# Altium PCB INCAM.PcbDoc
Units mm, origin at the board's own origin, x right, y up, seen from the top; angles counter-clockwise.
Board outline 60 x 44 mm, 2 copper layers (Top Layer, Bottom Layer); 20 components, 10 nets, 71 pads, 5 vias.
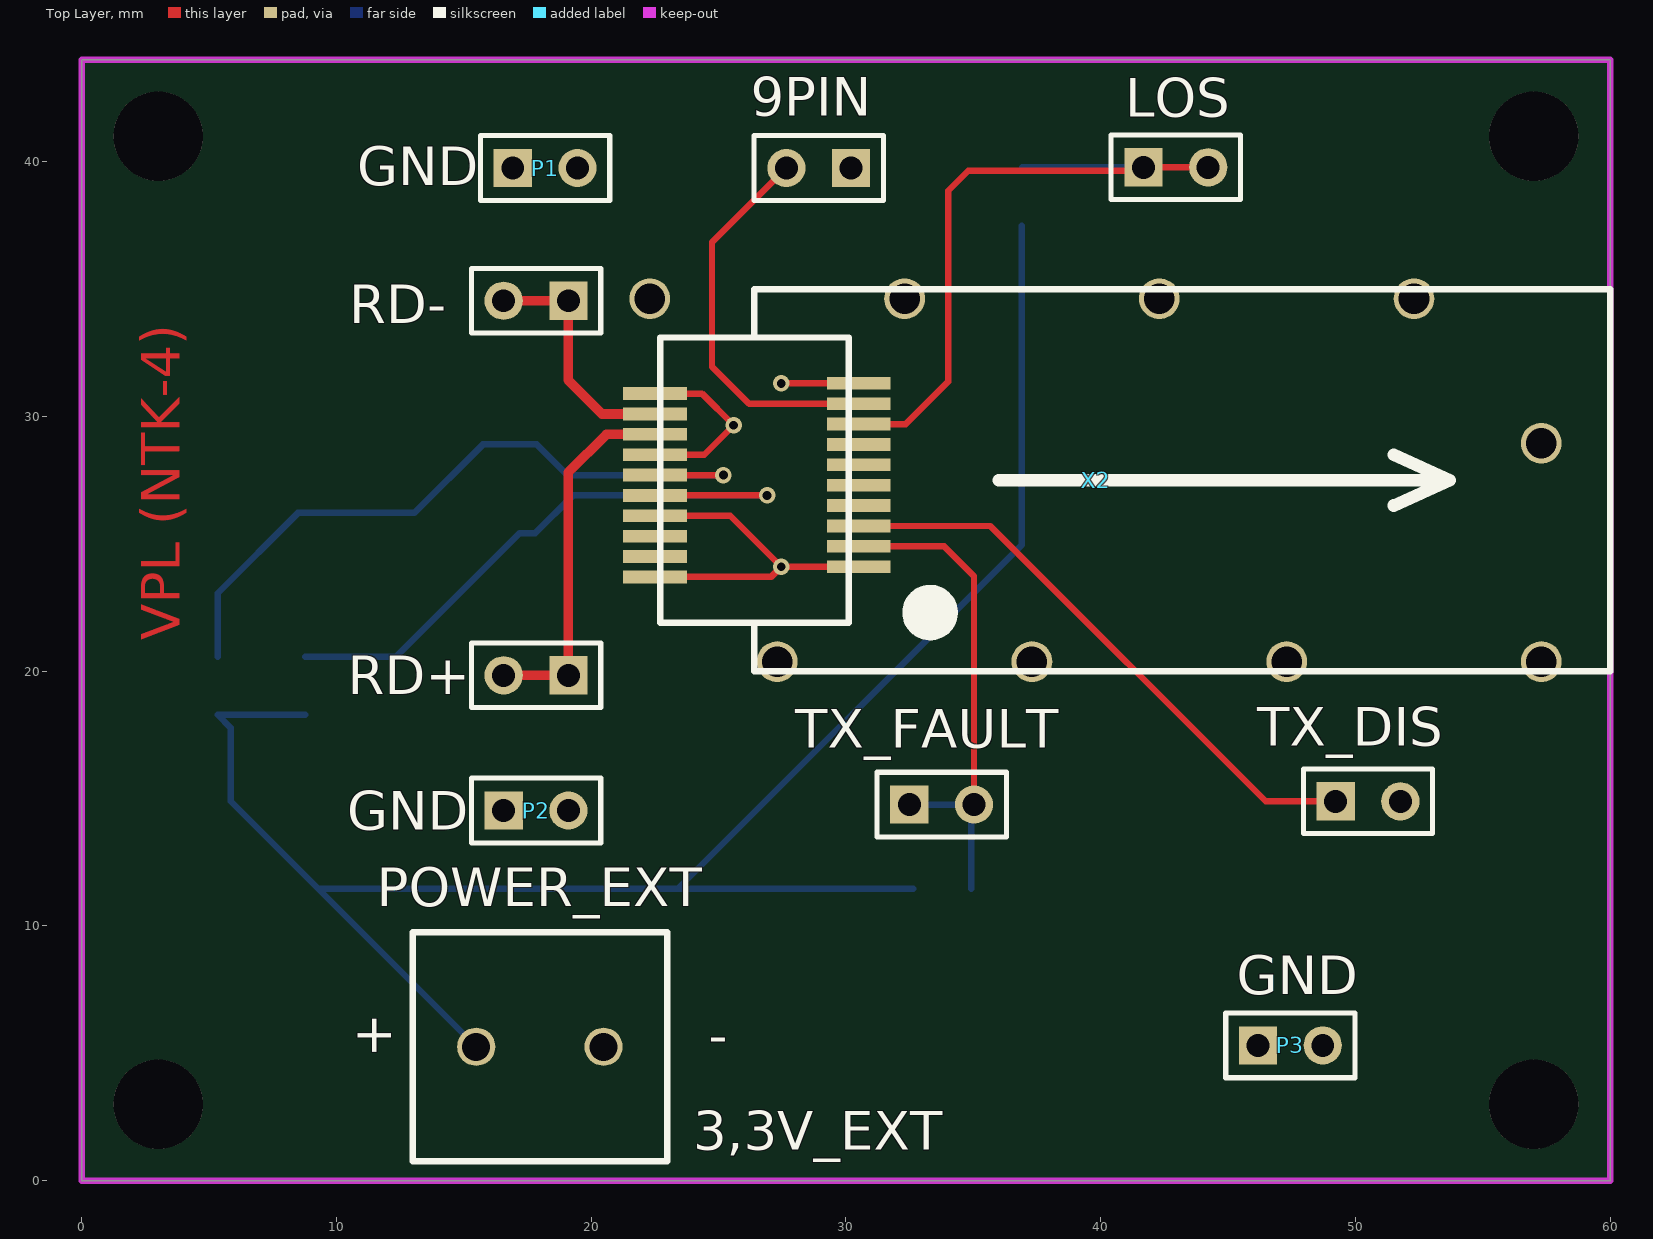
[diagram p0: Top Layer view]
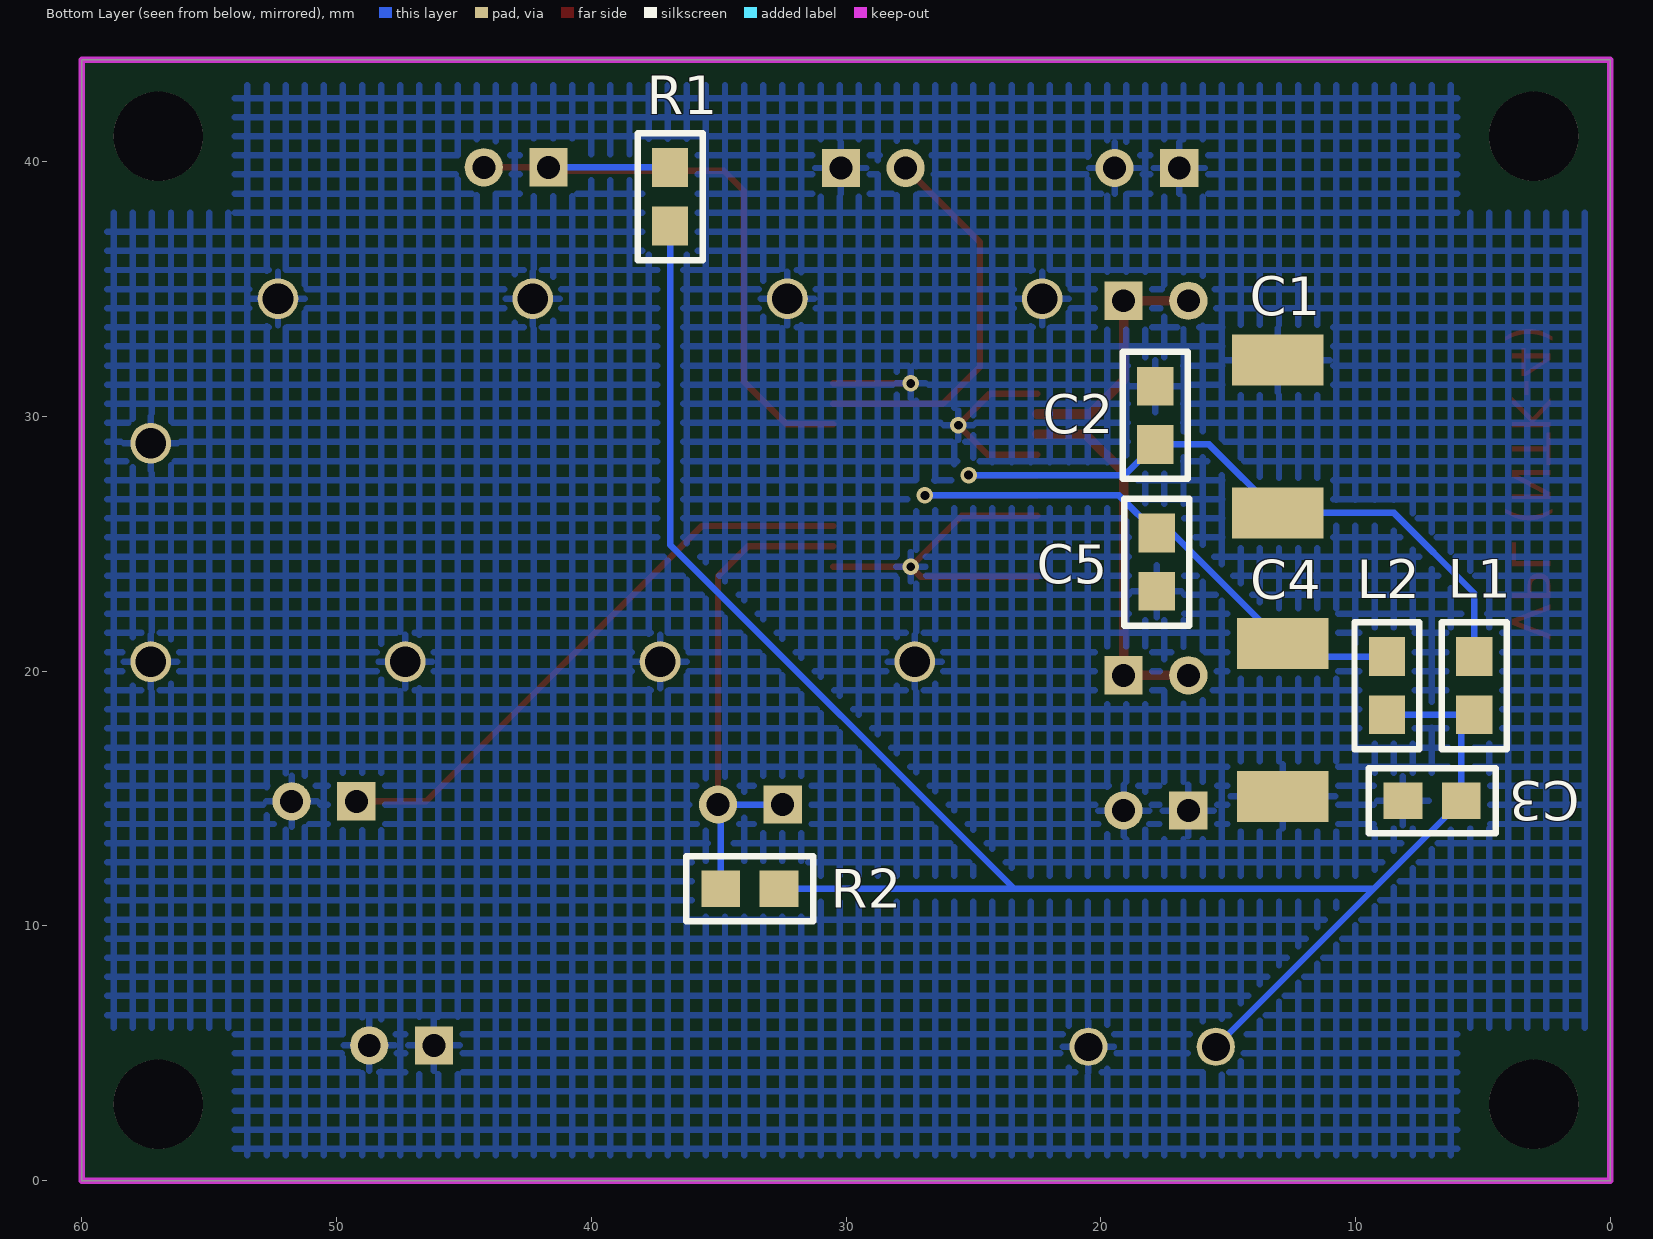
[diagram p1: Bottom Layer view, seen from below]

## Layer stack, top to bottom
Top Solder: solder mask 0.0102, Solder Resist, Dk 3.5
Top Layer: signal copper 0.0356
Dielectric 1: dielectric 0.32, FR-4, Dk 4.8
Bottom Layer: signal copper 0.0356
Bottom Solder: solder mask 0.0102, Solder Resist, Dk 3.5

## Board outline
0,0 60,0 60,44 0,44

## Design rules (kind name [scope] priority, off if disabled: settings)
Clearance [All] p1: gap=0.254
DiffPairsRouting [All] p1: maxlimit=0.254 minlimit=0.254 mostfreqgap=0.254 toplayer_minwidth=0.381 toplayer_maxwidth=0.381 toplayer_prefwidth=0.381 bottomlayer_minwidth=0.381 bottomlayer_maxwidth=0.381 bottomlayer_prefwidth=0.381 maxuncoupledlength=12.7
PolygonConnect [All] p1: connectstyle=Relief reliefconductorwidth=0.254 reliefentries=4 polygonreliefangle="90 Angle" airgapwidth=0.254
RoutingVias [All] p1: holewidth=0.711 width=1.27 viastyle="Through Hole" minholewidth=0.711 minwidth=1.27 maxholewidth=0.711 maxwidth=1.27
SolderMaskExpansion [All] p1: expansion=0.102
Width [All] p1: maxlimit=0.254 minlimit=0.254 preferedwidth=0.254
28 further rules are at their usual default settings.

## Classes and differential pairs
differential pair RD: +RD_P -RD_N

## Components (designator, comment, footprint, x,y, rotation, side; value= is the part's Value field where it differs from the comment)
9PIN "Header 2" HDR1X2 30.199,39.754 r180 top
C1 "22,0" Cap_BIG 11.149,33.304 r0 bottom
C2 "0,1" CAP_SMALL 16.585,27.539 r90 bottom
C3 "0,1" CAP_SMALL 9.498,13.645 r180 bottom
C4 "22,0" Cap_BIG 10.946,22.179 r0 bottom
C5 "0,1" CAP_SMALL 16.534,21.773 r90 bottom
L1 "4.7uH" RES 6.577,16.947 r180 bottom
L2 "4.7uH" RES 10.006,16.947 r180 bottom
LOS "Header 2" HDR1X2 41.68,39.781 r0 top
P1 "GND" HDR1X2 16.916,39.754 r0 top
P2 "GND" HDR1X2 16.561,14.529 r0 top
P3 "GND" HDR1X2 46.177,5.309 r0 top
POWER_EXT "KL_2" KLEMMNIK_2 15.482,5.254 r0 top (schematic designator X1)
R1 "4.7к" RES 38.151,36.144 r180 bottom
R2 "4.7к" RES 31.293,10.211 r90 bottom
RD+ "Header 2" HDR1X2 19.101,19.837 r180 top
RD- "Header 2" HDR1X2 19.101,34.544 r180 top
TX_DIS "Header 2" HDR1X2 49.224,14.889 r0 top
TX_FAULT "Header 2" HDR1X2 32.485,14.762 r0 top
X2 "SFP" SFP-20pin 60,20 r90 top

## Footprints (in the part's own frame and the unit in brackets; to place one, negate y for a bottom-side part, rotate by r counter-clockwise, add the part's x,y. Pads: shape width x height; smd on the part's side, far side on the other; paste and mask are expansions set on the pad)
Cap_BIG [mm] "FROM_MAX"
  rect 3.6x2 smd: 1(1.905,7.092) 2(1.905,1.092)
  body extent 0,-0.01 3.81,8.19, height 2.54
CAP_SMALL [mil] "FROM_MAX"
  rect 60x55.98 smd: 1(53.71,50) 2(143.71,50)
  silkscreen extent 1,0 197,100, body extent 20,18 178,82, height 100
HDR1X2 [mm] "Connector; Header; 2 Position"
  rect 1.5x1.5 hole 0.9: 1(0,0)
  round 1.5 hole 0.9: 2(2.54,0)
  silkscreen extent -1.27,-1.27 3.81,1.27
KLEMMNIK_2 [mm]
  round 1.5 hole 1.1: 1(0,0) 2(5,0)
  silkscreen extent -2.5,-4.5 7.5,4.5
RES [mil] "FROM_MAX"
  rect 55.98x60 smd: 1(49,52.71) 2(49,142.71)
  silkscreen extent -1,0 99,196, body extent 17,19 81,177, height 100
SFP-20pin [mm] "SFP-20pin"
  rect 0.5x2.5 smd: 1(4.1,29.5) 2(4.9,29.5) 3(5.7,29.5) 4(6.5,29.5) 5(7.3,29.5) 6(8.1,29.5) 7(8.9,29.5) 8(9.7,29.5) 9(10.5,29.5) 10(11.3,29.5) 11(10.9,37.5) 12(10.1,37.5) 13(9.3,37.5) 14(8.5,37.5) 15(7.7,37.5) 16(6.9,37.5) 17(6.1,37.5) 18(5.3,37.5) 19(4.5,37.5) 20(3.7,37.5)
  round 1.6 hole 1.2: h(0.375,32.7) h(0.375,22.7) h(0.375,12.7) h(0.375,2.7) h(8.95,2.7) h(14.625,27.7) h(14.625,37.7) h(14.625,7.7) h(14.625,17.7)
  silkscreen extent 0,0 15,37.3, body extent 1.9,29.9 13.1,37.3, height 5.4

## Part data
9PIN LOS RD+ RD- TX_DIS TX_FAULT: "Header, 2-Pin"
C1 C4: library part CAP_BIG
C2 C3 C5: library part CAP_SMALL
L1 L2 R1 R2: library part RES
P1 P2 P3: library part "Header 2", "Header, 2-Pin"
POWER_EXT: library part KLEMMNIK_2
X2: library part SFP-20pin

## Free pads (board coordinates)
  round 3.5 hole 3.5: 0(3,3) 0(3,41) 0(57,3) 0(57,41)

## Via types
v1: diameter 0.65, hole 0.35, Top Layer to Bottom Layer, 5 vias

## Nets (pads, with @x,y where several pads share a name; then routed paths per layer and width w, separated by ;. In a path a pad name is that pad's centre, name@x,y a point inside that pad or via, vN(x,y) a via of type N, cw(c..) or ccw(c..) an arc to the next point about the centre after c; other vN are vias at no path point)
3,3V: C3.2 L1.1 L2.1 POWER_EXT.1 R1.1 R2.1 | length 75.6
  Bottom Layer w0.254: L2.1 L1.1 5.848,17.77 C3.2 5.848,14.888 9.28,11.455 ; POWER_EXT.1 9.28,11.455 ; R2.1 23.393,11.455 ; R1.1 36.906,24.968 23.393,11.455 ; 9.28,11.455 23.393,11.455
GND: 9PIN.1 C1.2 C2.2 C3.1 C4.1 C5.1 P1.1 P1.2 P2.1 P2.2 P3.1 P3.2 POWER_EXT.2 TX_DIS.2 X2.1 X2.10 X2.11 X2.14 X2.17 X2.20 X2.h | length 24.2
  Top Layer w0.254: X2.20 27.057,23.7 v1(27.457,24.1) ; X2.17 25.457,26.1 v1(27.457,24.1) ; X2.14 24.436,28.5 v1(25.59,29.654) 24.345,30.9 X2.11 ; v1(27.457,31.3) X2.10 ; X2.1 v1(27.457,24.1)
Net9PIN_2: 9PIN.2 X2.9 | length 15.4
  Top Layer w0.254: 9PIN.2 24.74,36.834 24.74,31.953 26.193,30.5 X2.9
NetLOS_1: LOS.1 LOS.2 R1.2 X2.8 | length 27.1
  Top Layer w0.254: X2.8 32.342,29.7 34.011,31.369 34.011,38.862 34.796,39.647 41.546,39.647 LOS.1 LOS.2
  Bottom Layer w0.254: R1.2@36.912,39.781 LOS.1
NetTX_DIS_1: TX_DIS.1 X2.3 | length 23.2
  Top Layer w0.254: X2.3 35.666,25.7 46.477,14.889 TX_DIS.1
RD_N: RD-.1 RD-.2 X2.12 | length 9.3
  Top Layer w0.381: RD-.2@16.916,34.544 RD-.1 19.101,31.42 20.421,30.1 X2.12
RD_P: RD+.1 RD+.2 X2.13 | length 14.5
  Top Layer w0.381: RD+.2 RD+.1 19.101,27.813 20.588,29.3 X2.13
"TX FAULT": R2.2 TX_FAULT.1 TX_FAULT.2 X2.2 | length 19.9
  Top Layer w0.254: X2.2 33.85,24.9 35.025,23.725 TX_FAULT.2
  Bottom Layer w0.254: TX_FAULT.1 TX_FAULT.2 34.918,14.655 R2.2
VCCRX: C1.1 C2.1 L1.2 X2.15 | length 27.9
  Top Layer w0.254: X2.15 v1(25.185,27.7)
  Bottom Layer w0.254: L1.2 5.333,23.062 8.483,26.212 C1.1 15.745,28.903 C2.1 19.058,27.7 v1(25.185,27.7)
VCCTX: C4.2 C5.2 L2.2 X2.16 | length 25.2
  Top Layer w0.254: X2.16 v1(26.9,26.9)
  Bottom Layer w0.254: L2.2 12.336,20.572 C4.2 17.187,25.423 C5.2 19.281,26.9 v1(26.9,26.9)
pads on no net: X2.4 X2.5 X2.6 X2.7 X2.18 X2.19

## Polygon pours and split planes (outlines as drawn)
GND on Bottom Layer "Top Layer-No Net" (hatched 90Degree grid 0.75 track 0.254, remove dead copper, pour order 3): 1,43 1,1 59,1 59,43

## Keep-outs
Keep-Out Layer:
  the board outline again, w0.254

## Other copper
Top Layer:
  text "VPL (NTK-4)" at 3.835,21.209 h1.52 r90
Multi-Layer:
  pour cut-out: 6,44 6,38 0,38 0,44
  pour cut-out: 60,44 60,38 54,38 54,44
  pour cut-out: 60,6 60,0 54,0 54,6
  pour cut-out: 6,6 6,0 0,0 0,6

## Silkscreen, mask and mechanical layers (free items; w line width, h text height)
Top Overlay:
  text "-" at 25.35,6.092 h1.52 r180
  text "+" at 12.142,4.823 h1.52 r90
  text "3,3V_EXT" at 24.003,1.219 h1.52